# Altium PCB ST-Link V2.PcbDoc
Units mil, origin at the board's own origin, x right, y up, seen from the top; angles counter-clockwise.
Board outline 1205.13 x 560.13 mil, 2 copper layers (Top Layer, Bottom Layer); 26 components, 24 nets, 112 pads, 57 vias.
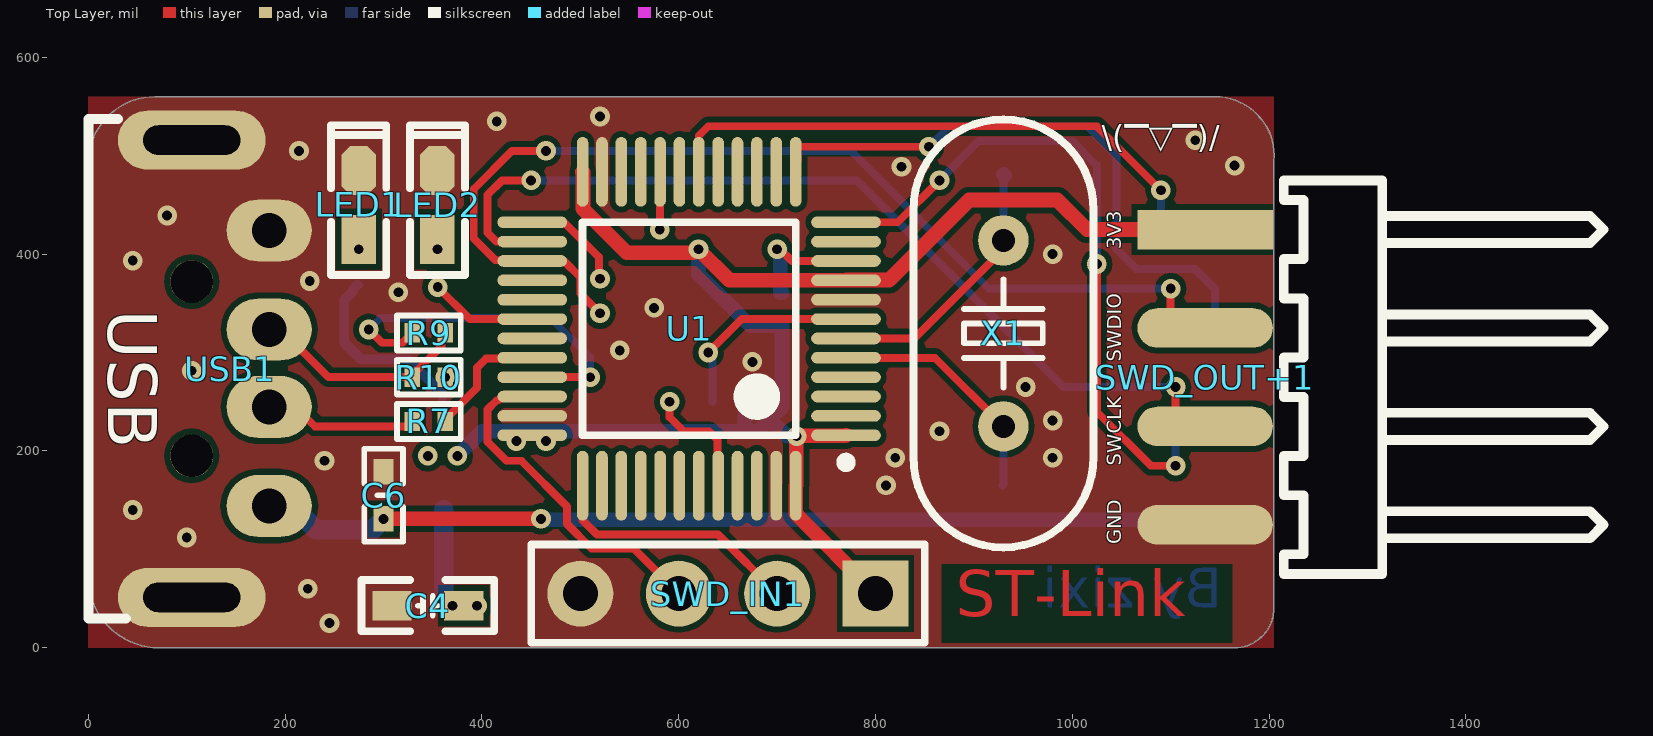
[diagram p0: Top Layer view]
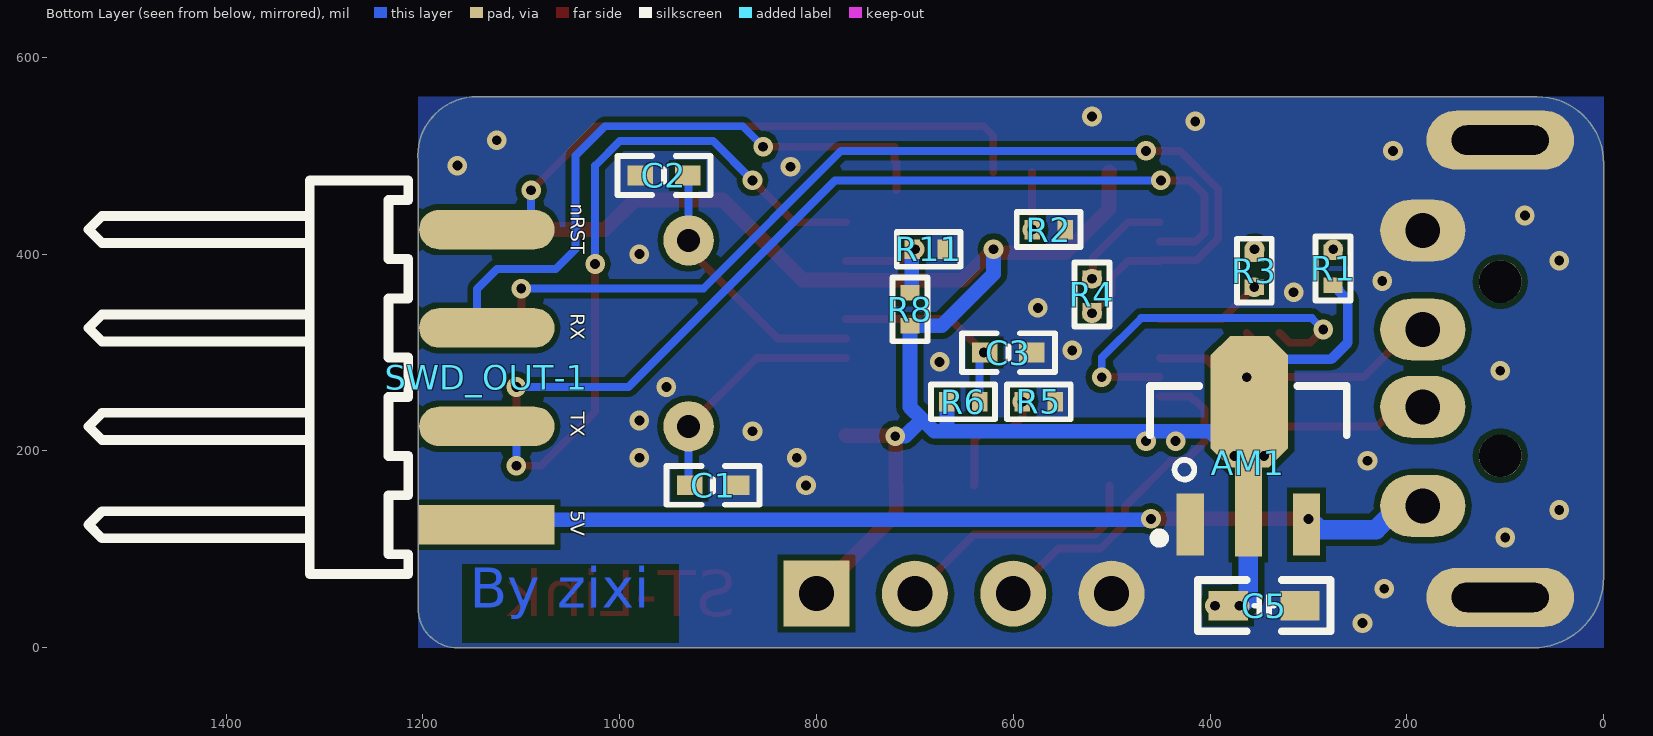
[diagram p1: Bottom Layer view, seen from below]

## Layer stack, top to bottom
Top Solder: solder mask 0.4, Solder Resist, Dk 3.5
Top Layer: signal copper 1.4
Dielectric 1: dielectric 12.6, FR-4, Dk 4.8
Bottom Layer: signal copper 1.4
Bottom Solder: solder mask 0.4, Solder Resist, Dk 3.5

## Board outline
0,71.46 0,492.61 cw(c67.39,492.61) 67.39,560 1140,560 cw(c1145,500) 1205,495 1205,40 cw(c1165,40) 1165,0 71.46,0 cw(c71.46,71.46)

## Design rules (kind name [scope] priority, off if disabled: settings)
Clearance [All] p1: gap=6 ignorepadtopadclearanceinfootprint=FALSE
HoleToHoleClearance [All] p1: gap=0 allowstackedmicrovias=TRUE
MinimumSolderMaskSliver [All] p1: minsoldermaskwidth=0
PlaneConnect [All] p1: planeconnectstyle=Direct reliefexpansion=20 reliefentries=4 reliefconductorwidth=10 reliefairgap=10
PolygonConnect [All] p1: connectstyle=Direct reliefconductorwidth=10 reliefentries=4 polygonreliefangle="90 Angle" airgapwidth=10
RoutingVias [All] p1: holewidth=10 width=20 viastyle="Through Hole" minholewidth=10 minwidth=20 maxholewidth=10 maxwidth=20
SilkToSilkClearance [All] p1: silktosilkclearance=0
SilkToSolderMaskClearance [IsPad] p1: minsilkscreentomaskgap=0 clearancetoexposedcopper=TRUE
SolderMaskExpansion [All] p1: expansion=4
Width [All] p1: maxlimit=20 minlimit=6 preferedwidth=8
25 further rules are at their usual default settings.

## Components (designator, comment, footprint, x,y, rotation, side; value= is the part's Value field where it differs from the comment)
AM1 "AMS1117-3.3" SOT89_M 361,206 r180 bottom
C1 "10pF" "C 0402_M" 905,165 r0 bottom
C2 "10pF" "C 0402_M" 955,480 r180 bottom
C3 "0.1uF" "C 0402_M" 605,300 r0 bottom
C4 "10uF" "C 0603_M" 345,42.72 r180 top
C5 "10uF" "C 0603_M" 345,42.72 r180 bottom
C6 "10uF" "C 0402_M" 300,155 r90 top
LED1 "Green" "LED 0603G" 275,450 r90 top
LED2 "Blue" "LED 0603B" 355,450 r90 top
R1 "2K" "R 0402_L" 275,386.3 r270 bottom
R2 "10K" "R 0402_L" 565,425 r180 bottom
R3 "2K" "R 0402_L" 355,384.25 r270 bottom
R4 "100R" "R 0402_L" 520,360 r270 bottom
R5 "10K" "R 0402_L" 575,250 r180 bottom
R6 "10K" "R 0402_L" 650,250 r0 bottom
R7 "22R" "R 0402_L" 345,230 r0 top
R8 "4.7K" "R 0402_L" 705,345 r270 bottom
R9 "22R" "R 0402_L" 346.96,320 r180 top
R10 "1K5" "R 0402_L" 346.96,275 r180 top
R11 "4.7K" "R 0402_L" 685,405 r0 bottom
SWD_IN1 "HDR-1X4" HDR2.54-LI-4P 650,55 r180 top
SWD_OUT+1 "HDR-1X4" HDR2.54-WS-4P 1135,275 r270 top
SWD_OUT-1 "HDR-1X4" HDR2.54-WS-4P 1135,275 r90 bottom
U1 "STM32F103CBT6" LQFP48_N 610.55,324.21 r180 top
USB1 "USB" USB_A/P_A 105,283.58 r270 top
X1 "8MHz" "OSC HC-49S" 930,319.49 r270 top

## Footprints (in the part's own frame and the unit in brackets; to place one, negate y for a bottom-side part, rotate by r counter-clockwise, add the part's x,y. Pads: shape width x height; smd on the part's side, far side on the other; paste and mask are expansions set on the pad)
"C 0402_M" [mil] "无极性贴片电容                                  淘宝ID:黄晶宝石"
  rect 26x20 smd: 1(-24,0) 2(24,0)
  silkscreen extent -47,-20 47,20, body extent -20,-10 20,10, height 21
"C 0603_M" [mil] "无极性贴片电容                                淘宝ID:黄晶宝石"
  rect 40x30 smd: 1(-36.5,0) 2(36.5,0)
  silkscreen extent -68,-26 68,26, body extent -31,-16 31,16, height 32
HDR2.54-LI-4P [mm] "排针，4脚"
  rect 1.7x1.7 hole 0.9: 1(-3.81,0)
  round 1.7 hole 0.9: 2(-1.27,0) 3(1.27,0) 4(3.81,0)
  silkscreen extent -5.08,-1.27 5.08,1.27, body extent -5.08,-1.27 5.08,1.27, height 8.5
HDR2.54-WS-4P [mm] "4P卧式贴片排针2.54"
  rect 1.02x3.5 smd: 1(-3.81,0)
  oval 1.02x3.5 smd: 2(-1.27,0) 3(1.27,0) 4(3.81,0)
  silkscreen extent -5.08,2.03 5.08,10.29, body extent -5.08,-0.76 5.08,10.34, height 2.54
"LED 0603B" [mil] "蓝色0603LED                             淘宝ID:黄晶宝石"
  rect 50x35 smd: 1(-35,0.26)
  oct 50x35 smd: 2(35,0.26)
  silkscreen extent -71,-28 81,28, body extent -31,-16 32,16, height 24
"LED 0603G" [mil] "绿色0603LED                                   淘宝ID:黄晶宝石"
  rect 50x35 smd: 1(-35,0.26)
  oct 50x35 smd: 2(35,0.26)
  silkscreen extent -71,-28 81,28, body extent -31,-16 32,16, height 18
LQFP48_N [mm] "封装库来自淘宝 ID：黄晶宝石 Thin QFP, 48-Leads, Body 7x7mm, Pitch 0.5mm, IPC Medium Density"
  oval 1.8x0.3 smd: 1(-4.05,2.75) 2(-4.05,2.25) 3(-4.05,1.75) 4(-4.05,1.25) 5(-4.05,0.75) 6(-4.05,0.25) 7(-4.05,-0.25) 8(-4.05,-0.75) 9(-4.05,-1.25) 10(-4.05,-1.75) 11(-4.05,-2.25) 12(-4.05,-2.75) 25(4.05,-2.75) 26(4.05,-2.25) 27(4.05,-1.75) 28(4.05,-1.25) 29(4.05,-0.75) 30(4.05,-0.25) 31(4.05,0.25) 32(4.05,0.75) 33(4.05,1.25) 34(4.05,1.75) 35(4.05,2.25) 36(4.05,2.75)
  oval 0.3x1.8 smd: 13(-2.75,-4.05) 14(-2.25,-4.05) 15(-1.75,-4.05) 16(-1.25,-4.05) 17(-0.75,-4.05) 18(-0.25,-4.05) 19(0.25,-4.05) 20(0.75,-4.05) 21(1.25,-4.05) 22(1.75,-4.05) 23(2.25,-4.05) 24(2.75,-4.05) 37(2.75,4.05) 38(2.25,4.05) 39(1.75,4.05) 40(1.25,4.05) 41(0.75,4.05) 42(0.25,4.05) 43(-0.25,4.05) 44(-0.75,4.05) 45(-1.25,4.05) 46(-1.75,4.05) 47(-2.25,4.05) 48(-2.75,4.05)
  silkscreen extent -4.18,-2.75 2.75,3.57, body extent -4.5,-4.5 4.5,4.5, height 1.45
"OSC HC-49S" [mm] "封装库来自淘宝卖家 ID：黄晶宝石"
  round 1.3 hole 0.6: 1(-2.4,0) 2(2.4,0)
  silkscreen extent -5.52,-2.32 5.52,2.33, body extent -5.52,-2.32 5.53,2.33, height 4.13
"R 0402_L" [mm] "1/16W贴片电阻     淘宝ID:黄晶宝石"
  rect 0.4x0.5 smd: 1(-0.4,0) 2(0.45,0)
  silkscreen extent -0.8,-0.45 0.85,0.45, body extent -0.5,-0.25 0.5,0.25, height 0.3
SOT89_M [mm] "4.6x4.3x1.6mm(长宽高) 封装库来自淘宝卖家 ID：黄晶宝石"
  rect 0.7x1.6 smd: 1(-1.5,-2.054) 3(1.5,-2.054)
  rect 0.7x2.4 smd: 2(0,-1.676)
  oct 2x3.4 smd: 2(0.025,1.118)
  silkscreen extent -2.54,-2.52 2.54,1.52, body extent -2.3,-2.4 2.3,1.9, height 1.6
USB_A/P_A [mm] "A型USB 插头，20*13*4.5mm"
  round 1.1 hole 1.1: 0(-2.25,0) 0(2.25,0)
  oval 1.6x2.2 hole 0.9: 1(3.543,2) 2(0.987,2) 3(-1.013,2) 4(-3.569,2)
  oval 1.524x3.81 hole 0.762 slot 2.5 at 90 deg: 4(-5.9,0) 4(5.9,0)
  silkscreen extent -6.45,-2.67 6.45,-1.7, body extent -6.47,-17.9 6.47,2.1, height 3.25

## Part data
C1 C2 C3 C4 C5 C6: library part C, "贴片电容"
LED1 LED2: library part LED-SMD, "贴片LED"
R1 R2 R3 R4 R5 R6 R7 R8 R9 R10 R11: library part R, "贴片电阻"
SWD_IN1 SWD_OUT+1 SWD_OUT-1: library part "Header 4", "4P接插件"
  SWD_IN1: BOM名称=4P接插件, 封装库来自淘宝卖家  ID：黄晶宝石=其他店铺购入均为盗版假冒封, 技术支持， 联系售后=唯一出售店铺网址https://shop463601444.taobao.com
U1: "STM32 ARM-based 32-bit MCU Performance Line with 128 kB Flash, 20 kB Internal RAM, -40 to +85癈 Temperature, 48-Pin LQFP, Tray"
USB1: library part USB-A/P, "USB-A型公接口"
X1: library part XTAL-2P, "2脚无源脚晶振"

## Via types
v1: diameter 20, hole 10, Top Layer to Bottom Layer, 57 vias

## Nets (pads, with @x,y where several pads share a name; then routed paths per layer and width w, separated by ;. In a path a pad name is that pad's centre, name@x,y a point inside that pad or via, vN(x,y) a via of type N, cw(c..) or ccw(c..) an arc to the next point about the centre after c; other vN are vias at no path point)
3V3: AM1.2 C4.1 C5.1 R1.2 R6.2 R8.2 R10.1 SWD_IN1.1 SWD_OUT+1.1 U1.1 U1.9 U1.24 U1.36 U1.48 | length 1922.9
  Top Layer w15: U1.24 502.56,483.38 502.56,446.1 547.16,401.5 615.14,401.5 618.65,405 v1(620,405) 651.57,373.43 U1.9 770.28,373.7 813.7,373.7 895,455 985,455 1015,425 SWD_OUT+1.1 ; U1.1 769.53,215.47 720.47,215.47 v1(720,215) 719.41,214.41 719.41,165.35 U1.48 718.82,136.18 SWD_IN1.1
  Bottom Layer w8: R1.2@269.16,362.74 R1.2@269.16,364.71 ; R1.2@273.03,368.58 R1.2 ; AM1.2@360,250 AM1.2@360,257.87
  Bottom Layer w10: R1.2@269.16,362.74 260,353.58 260,310 276.76,293.24 324.63,293.24 AM1.2@360,257.87 ; R1.2@269.16,364.71 R1.2@273.03,368.58
  Bottom Layer w15: v1(375,195) 400,220 665,220 ; v1(620,405) 620,380 672.66,327.34 R8.2 R8.2 705,244.73 692.64,232.37 ; R6.2@667.71,248.03 R6.2 667.34,249.63 667.34,222.34 665,220 ; v1(720,215) 710,215 692.64,232.37 ; 665,220 680.27,220 692.64,232.37
  Bottom Layer w20: AM1.2@361,140 361,51.72 v1(370,42.72)
  other v1: 395,42.72 345,195 435,210 465,210 362.71,275
5V: AM1.3 C6.1 SWD_OUT-1.1 USB1.1 | length 968.3
  Top Layer w15: v1(300,131) v1(460,131)
  Bottom Layer w15: v1(460,131) 460.96,130.04 1129.96,130.04 SWD_OUT-1.1
  Bottom Layer w20: USB1.1 207.18,144.1 231.29,120 289,120 v1(300,131)
AIN: R8.1 R11.2 U1.10 | length 121
  Top Layer w8: v1(700,405) 703.25,405 715.14,393.11 U1.10
  Bottom Layer w15: R11.2 703.09,404.63 703.09,361.13 703.46,360.75 R8.1
BOOT1: R2.1 U1.20 | length 58.8
  Top Layer w8: v1(580.75,425) 580.89,425.13 580.89,483.53 U1.20
D_SWCLK: SWD_IN1.2 U1.37 | length 263.7
  Top Layer w8: U1.37 502.28,129.69 516.97,115 640,115 SWD_IN1.2
D_SWDIO: SWD_IN1.3 U1.34 | length 352.4
  Top Layer w8: U1.34 420.54,255.32 416.76,251.54 414.99,251.54 405.67,242.22 405.67,209.36 425.03,190 440,190 486.38,143.62 486.38,125.79 511.17,101 554,101 SWD_IN1.3
GND: AM1.1 C1.1 C2.1 C3.1 C4.2 C5.2 C6.2 LED1.2 LED2.2 R2.2 R5.2 R11.1 SWD_IN1.4 SWD_OUT+1.4 U1.8 U1.23 U1.35 U1.47 USB1.4
  other v1: 245,25 222.95,60 100,112 45,140 810.74,165 240,190 820,193.14 980,193.14 865,220 980,230.98 952.53,265 105,281.58 674.8,290.55 540,302.22 575,345.46 315,361.29 225,372.78 45,393.46 980,400.06 80,439.34 826.38,488.93 1165,490 214.05,505 1125,515.87 415,535 520,540
LED: R3.2 U1.30 | length 109.6
  Top Layer w8: v1(355,366.54) 387.48,334.06 U1.30
NetC1_2: C1.2 U1.5 X1.2 | length 250
  Top Layer w8: U1.5 860.31,294.69 X1.2
  Bottom Layer w8: C1.2 930,166 X1.2
  Bottom Layer w15: X1.2 X1.2@930.5,224.5
NetC2_2: C2.2 U1.6 X1.1 | length 275.8
  Top Layer w8: U1.6 839.37,314.37 930,405 X1.1
  Bottom Layer w8: X1.1 930,479 C2.2
  Bottom Layer w15: X1.1 X1.1@931.01,414.99 ; C2.2@929.99,481.01 C2.2
NetC3_2: C3.2 R6.1 U1.7 | length 206.3
  Top Layer w8: v1(630,300) 664.06,334.06 U1.7
  Bottom Layer w8: C3.2 634.25,294.75 R6.1
NetLED1_1: LED1.1 R1.1
  other v1: 274.74,405
NetLED2_1: LED2.1 R3.1
  other v1: 354.74,405
NetR4_1: R4.1 U1.25 | length 105
  Top Layer w8: U1.25 483.44,432.48 518.92,397 518.92,376.08 v1(520,375)
NetR5_1: R5.1 U1.44 | length 120.9
  Top Layer w8: v1(590.75,250) 590.75,234.25 605,220 630.94,220 639.35,211.6 639.35,165.49 U1.44
NetR7_1: R7.1 USB1.2 | length 156.4
  Top Layer w8: USB1.2 210.43,244.73 230.16,225 325.37,225 329.25,228.87 R7.1
NetR9_1: R9.1 R10.2 USB1.3 | length 224.4
  Top Layer w8: USB1.3 195.55,323.47 244.02,275 R10.2 329.25,276.97 358.84,306.56 358.84,316.13 R9.1
nRST: SWD_OUT-1.4 U1.18 | length 615.9
  Top Layer w8: U1.18 620.39,520.31 630.08,530 1025,530 v1(1090,465)
  Bottom Layer w8: v1(1090,465) 1088.25,465 1090.18,463.07 1090.18,439.85 1105.04,425 SWD_OUT-1.4
T_SWCLK: SWD_OUT+1.3 U1.26 | length 941
  Top Layer w8: v1(450,475) 420.36,475 405.67,460.31 405.67,421.81 414.69,412.8 U1.26 ; v1(1105,265) 1105,239.85 1119.58,225.27 SWD_OUT+1.3@1134.73,225.27
  Bottom Layer w8: v1(450,475) 781.1,475 991.1,265 v1(1105,265)
T_SWDIO: R4.2 SWD_OUT+1.2 U1.27 | length 1067.7
  Top Layer w8: v1(465,505) 430.56,505 391.67,466.11 391.67,416.01 413.84,393.84 450.37,393.84 U1.27 483.44,393.11 500,376.55 500,360 v1(520,340) ; v1(1100,365) 1100,340.56 1099.29,339.85 1113,326.14 SWD_OUT+1.2@1133.86,326.14
  Bottom Layer w8: v1(465,505) 775,505 915,365 v1(1100,365)
USART2_RX: SWD_OUT-1.3 U1.13 | length 645.9
  Top Layer w8: U1.13@718.82,465 U1.13 718.82,493.24 720.58,495 720.58,509.19 v1(854.19,509.19)
  Bottom Layer w8: v1(854.19,509.19) 875,530 1015,530 1045,500 1045,405 1065,385 1124.71,385 1145,364.71 1145,335 SWD_OUT-1.3
USART2_TX: SWD_OUT-1.2 U1.12 | length 713.6
  Top Layer w8: U1.12 822.48,432.48 v1(865,475) ; v1(1025,390) 1025,240 1080,185 v1(1105,185)
  Bottom Layer w8: v1(865,475) 905,515 1000,515 1025,490 v1(1025,390) ; v1(1105,185) 1105,210.15 1119.85,225 SWD_OUT-1.2
"USB DM": R7.2 U1.32 | length 128.3
  Top Layer w8: R7.2 362.71,231.97 395,264.25 395,284.69 404.27,293.96 450.37,293.96 U1.32
"USB DP": R9.2 U1.33 | length 379.2
  Top Layer w8: v1(285,323.47) 298.47,310 319.25,310 R9.2 ; U1.33 v1(510,275)
  Bottom Layer w8: v1(285,323.47) 296.53,335 470,335 510,295 v1(510,275)
pads on no net: U1.2 U1.3 U1.4 U1.11 U1.14 U1.15 U1.16 U1.17 U1.19 U1.21 U1.22 U1.28 U1.29 U1.31 U1.38 U1.39 U1.40 U1.41 U1.42 U1.43 U1.45 U1.46 USB1.0

## Polygon pours and split planes (outlines as drawn)
GND on Bottom Layer "Bottom Layer-GND" (solid, pour order 0): 0,560 0,0 1205,0 1205,560
GND on Top Layer "Top Layer-GND" (solid, pour order 2): 0,560 0,0 1205,0 1205,560

## Other copper
Top Layer:
  pour cut-out: 867.5,85 867.5,5 1162.5,5 1162.5,85
  text "ST-Link" at 881.31,16.55 h80
Bottom Layer:
  pour cut-out: 940,85 940,5 1160,5 1160,85
  text "By zixi" at 1152.21,26.85 h70

## Silkscreen, mask and mechanical layers (free items; w line width, h text height)
Top Overlay:
  text "\(▔▽▔)/" at 1030,500 h40
  text "3V3" at 1055,405 h25 r90
  text "SWDIO" at 1055,290.55 h25 r90
  text "SWCLK" at 1055,185 h25 r90
  text "GND" at 1055,105 h25 r90
Bottom Overlay:
  text "nRST" at 1055,451.3 h25 r90
  text "RX" at 1055,340 h25 r90
  text "TX" at 1055,240 h25 r90
  text "5V" at 1055,140 h25 r90
Top Solder:
  rectangle: 865,5 1165,85
Bottom Solder:
  rectangle: 940,5 1165,85
Mechanical 1:
  the board outline again, w10